# Altium PCB Remote_PCB_2.PcbDoc
Units mil, origin at the board's own origin, x right, y up, seen from the top; angles counter-clockwise.
Board outline 1210 x 1445 mil, 2 copper layers (Top Layer, Bottom Layer); 11 components, 10 nets, 40 pads, 0 vias.
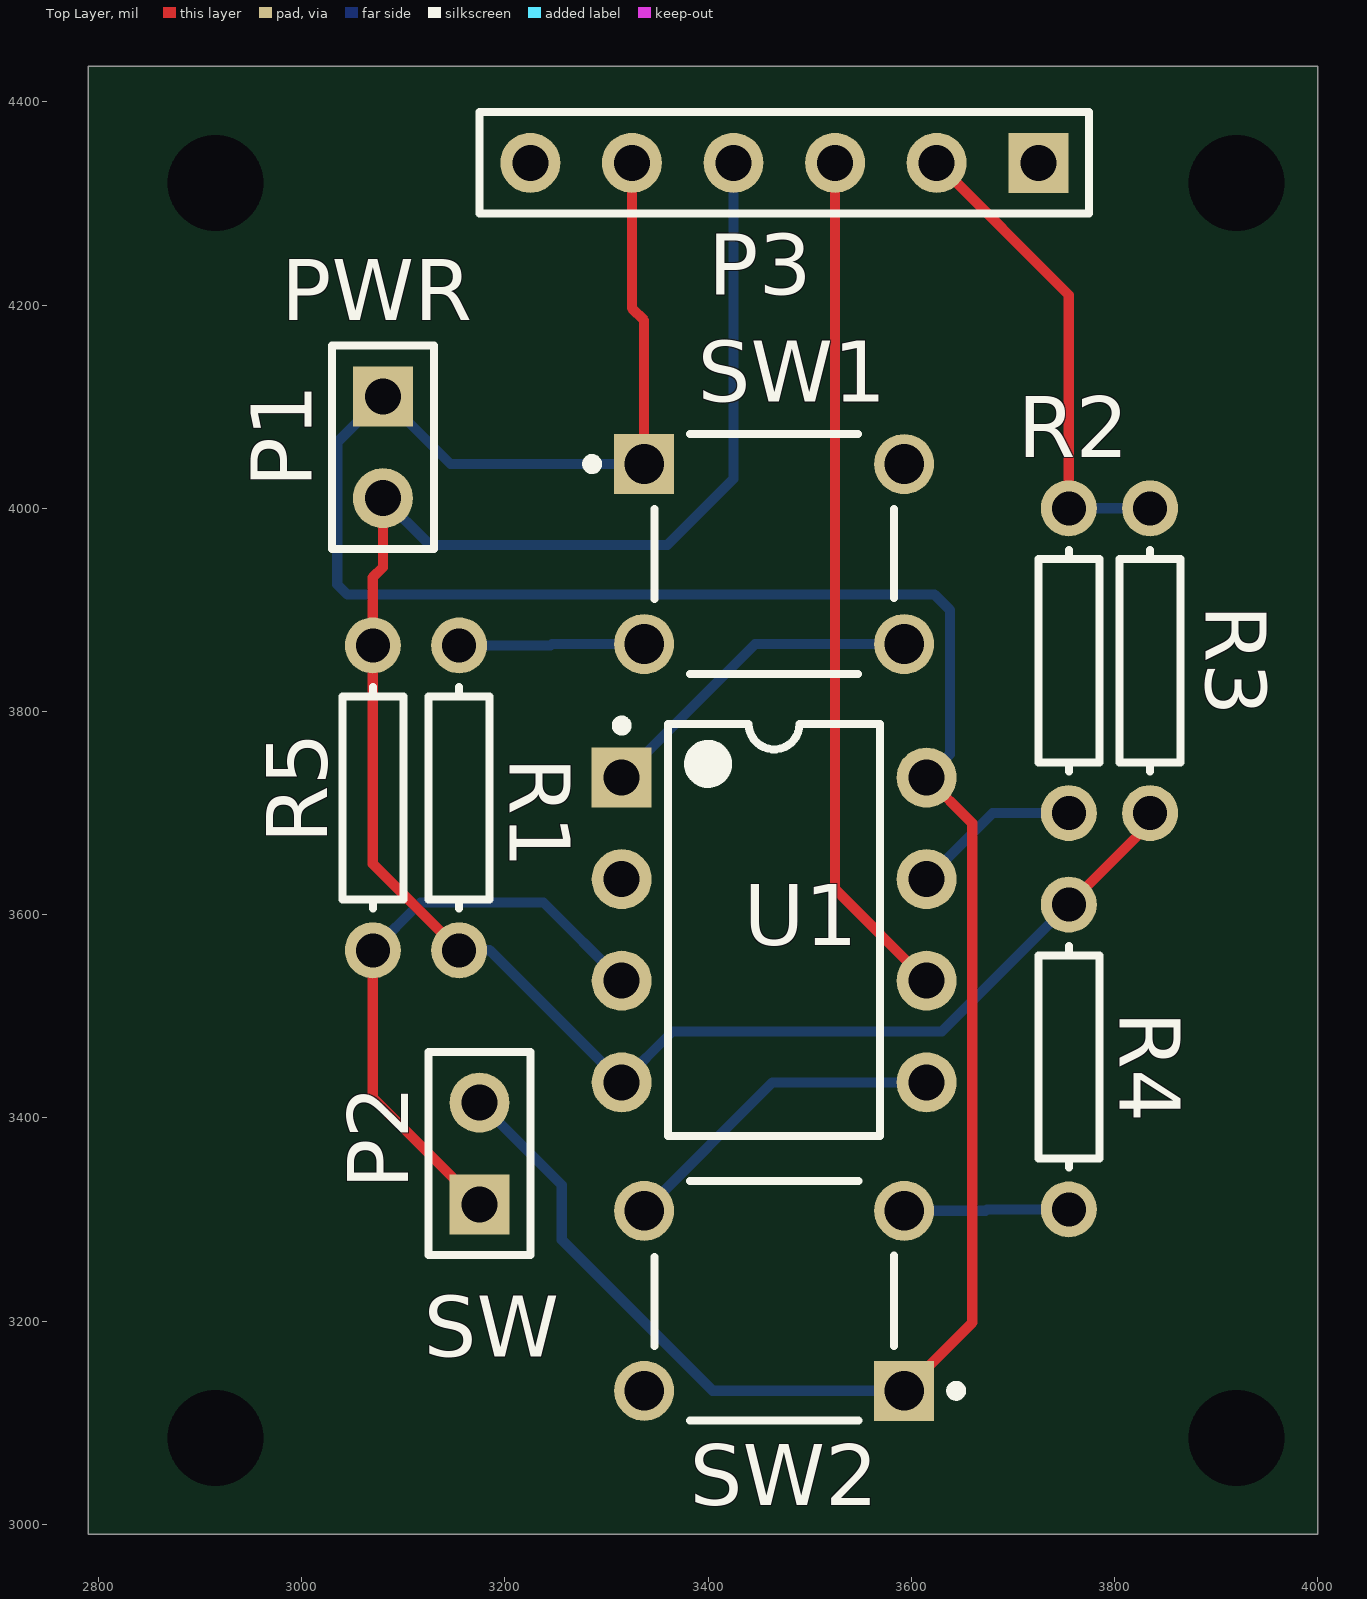
[diagram p0: Top Layer view]
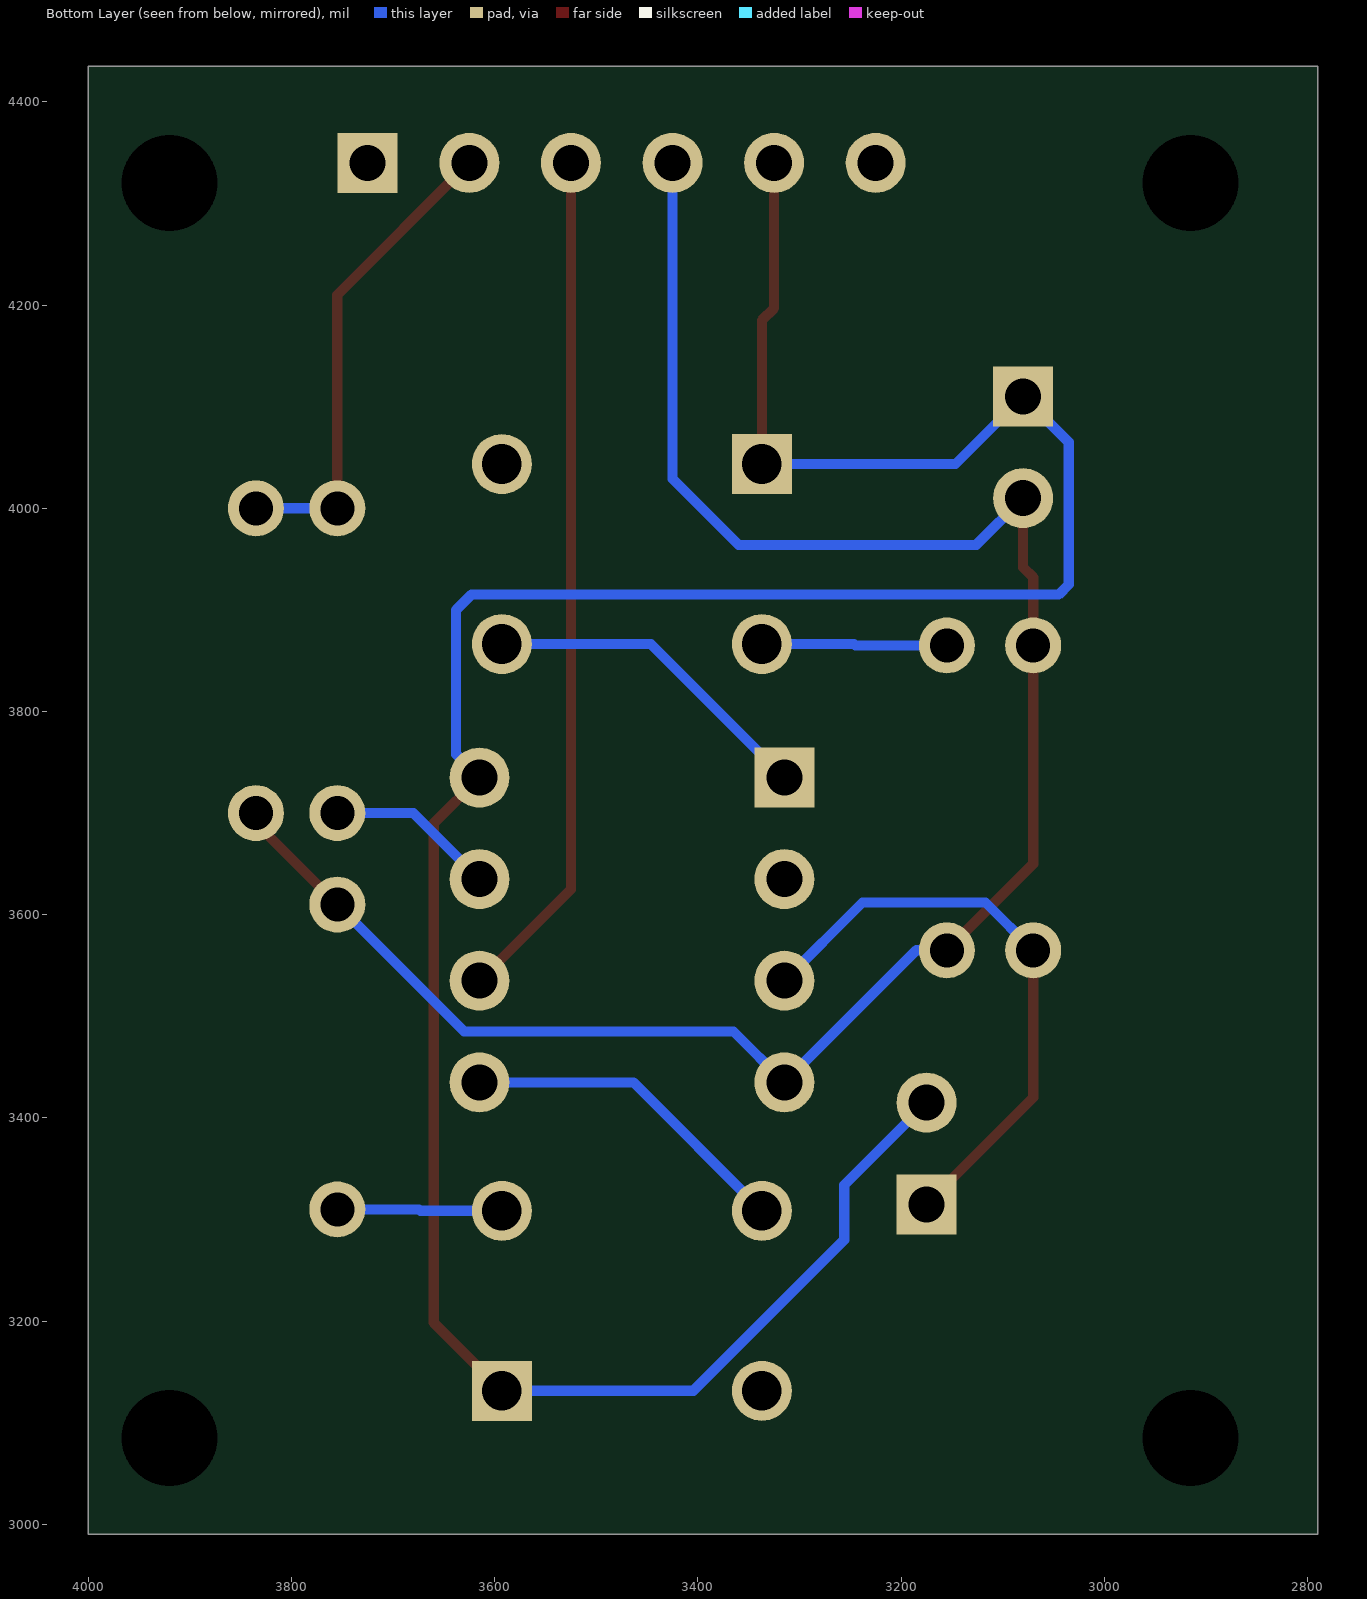
[diagram p1: Bottom Layer view, seen from below]

## Layer stack, top to bottom
Top Solder: solder mask 0.4, Solder Resist, Dk 3.5
Top Layer: signal copper 1.4
Dielectric 1: dielectric 12.6, FR-4, Dk 4.8
Bottom Layer: signal copper 1.4
Bottom Solder: solder mask 0.4, Solder Resist, Dk 3.5

## Board outline
2790,2990 4000,2990 4000,4435 2790,4435

## Design rules (kind name [scope] priority, off if disabled: settings)
Clearance [All] p1: gap=10 ignorepadtopadclearanceinfootprint=FALSE except(0: Arc-Hole Track-Hole SMDPad-Hole THPad-Hole Via-Hole Fill-Hole Poly-Hole Region-Hole Text-Hole)
PolygonConnect [All] p1: connectstyle=Relief reliefconductorwidth=10 reliefentries=4 polygonreliefangle="90 Angle" airgapwidth=10
RoutingVias [All] p1: holewidth=28 width=50 viastyle="Through Hole" minholewidth=28 minwidth=50 maxholewidth=28 maxwidth=50
SolderMaskExpansion [All] p1: expansion=4 istentingtop=FALSE
Width [All] p1: maxlimit=10 minlimit=10 preferedwidth=10
30 further rules are at their usual default settings.

## Components (designator, comment, footprint, x,y, rotation, side; value= is the part's Value field where it differs from the comment)
P1 "Header 2" HDR1X2 3080,4110 r270 top
P2 "Header 2" HDR1X2 3175,3315 r90 top
P3 "Header 6" HDR1X6 3725,4340 r180 top
R1 "Res1" AXIAL-0.3 3155,3715 r270 top value=1K
R2 "Res1" AXIAL-0.3 3755,3850 r90 top value=1K
R3 "Res1" AXIAL-0.3 3835,3850 r270 top value=2K
R4 "Res1" AXIAL-0.3 3755,3460 r90 top value=1K
R5 "Res1" AXIAL-0.3 3070,3715 r270 top value=1K
SW1 "1825910-6" TECO-1825910-6_V 3465,3955 r0 top
SW2 "1825910-6" TECO-1825910-6_V 3465,3220 r180 top
U1 "ATtiny85V-10PU" 8P3 3465,3585 r0 top

## Footprints (in the part's own frame and the unit in brackets; to place one, negate y for a bottom-side part, rotate by r counter-clockwise, add the part's x,y. Pads: shape width x height; smd on the part's side, far side on the other; paste and mask are expansions set on the pad)
8P3 [mm] "DIP, 8-Pin, Row Spacing 7.62 mm, Pitch 2.54 mm"
  rect 1.5x1.5 hole 0.9: 1(-3.81,3.81)
  round 1.5 hole 0.9: 2(-3.81,1.27) 3(-3.81,-1.27) 4(-3.81,-3.81) 5(3.81,-3.81) 6(3.81,-1.27) 7(3.81,1.27) 8(3.81,3.81)
  silkscreen extent -3.93,-5.15 2.65,5.23, body extent -3.6,-5.15 3.6,5.15, height 5.33
AXIAL-0.3 [mm] "Axial Device, Thru-Hole; 2 Leads; 0.3 in Pin Spacing"
  round 1.4 hole 0.85: 1(-3.81,0) 2(3.81,0)
  silkscreen extent -2.77,-0.76 2.77,0.76
HDR1X2 [mm] "Connector; Header; 2 Position"
  rect 1.5x1.5 hole 0.9: 1(0,0)
  round 1.5 hole 0.9: 2(2.54,0)
  silkscreen extent -1.27,-1.27 3.81,1.27
HDR1X6 [mm] "Connector; Header; 6 Position"
  rect 1.5x1.5 hole 0.9: 1(0,0)
  round 1.5 hole 0.9: 2(2.54,0) 3(5.08,0) 4(7.62,0) 5(10.16,0) 6(12.7,0)
  silkscreen extent -1.27,-1.27 13.97,1.27
TECO-1825910-6_V [mm] "Switch, 4-Leads, Body 5.99x5.99mm"
  rect 1.5x1.5 hole 0.99: 1(-3.25,2.25)
  round 1.5 hole 0.99: 2(3.25,2.25) 3(-3.25,-2.25) 4(3.25,-2.25)
  silkscreen extent -4.67,-3 3,3, body extent -3,-2.99 2.99,3, height 5

## Part data
P1 P2: "Header, 2-Pin", LatestRevisionDate=17-Jul-2002, LatestRevisionNote="Re-released for DXP Platform.", Publisher="Altium Limited"
P3: "Header, 6-Pin", LatestRevisionDate=17-Jul-2002, LatestRevisionNote="Re-released for DXP Platform.", Publisher="Altium Limited"
R1 R2 R3 R4 R5: "Resistor", LatestRevisionDate=17-Jul-2002, LatestRevisionNote="Re-released for DXP Platform.", PackageDescription="Axial Device, Thru-Hole; 2 Leads; 0.3 in Pin Spacing", PackageReference=AXIAL-0.3, Published=8-Jun-2000, Publisher="Altium Limited"
SW1 SW2: library part CMP-1684-00021-1, "Tact Switch, SPST-NO, 0.05 A, -35 to 85 degC, 4-Pin THD, RoHS, Bulk", Actuator Color=Black, Contact Rating @ Voltage=0.05A@24VDC, Dielectric Strength=500VAC, Manufacturer="TE Connectivity", Maximum AC Voltage Rating=N/A, Maximum Contact Resistance=100mOhm, Maximum DC Voltage Rating=24V, Minimum Insulation Resistance=100MOhm, Operating Temperature=-35to85C, Package Description="4-Pin Through Hole Device, Body 5.99 x 5.99 mm, Pitch 6.5 mm", Package Reference=THD, Actuator Length=1.4mm, Actuator Material=PolybutyleneTerephthalate, Actuator Style=RoundButton, Base Material=N/A, Body Orientation=Straight, Bushing Type=Unthreaded, Contact Material=CopperAlloy, Contact Plating=Silver, Datasheet URL=http://www.te.com/commerce/DocumentDelivery/DDEController?Action=showdoc&DocId=Customer+Drawing%7F1825910%7FC9%7Fpdf%7FEnglish%7FENG_CD_1825910_C9.pdf%7F1825910-6, Datasheet Version="Rev. C9", Dimension=5.99x5mm, Electrical Life=100000Cycles, Family=1825910, Function=MomentaryContact, Housing Material=N/A, Illumination=N/R, Manufacturer URL=http://www.te.com, Mechanical Life=100000Cycles, Mounting=ThroughHole, Packaging=N/A, Part No=1825910-6, Pole Throw Configuration=SPST, Product Weight=N/A, RoHS=Yes, Seal Description=N/A, Seal Location=N/A, Switch Configuration=OFF(ON), Terminal Type=PCPins, Thread Size=N/R
U1: library part CMP-0093-00033-2, "8-bit AVR Microcontroller, 10MHz, 1.8-5.5V, 8K Flash, 512 Bytes EEPROM, 512 Bytes SRAM, Industrial Grade (-40°C to 85°C), 8-Lead PDIP, Pb-Free", Code_JEDEC=MS-001-BA, ComponentLink1Description="Manufacturer URL", ComponentLink1URL=http://www.atmel.com/, ComponentLink2Description="ATtiny25/45/85 Datasheet", ComponentLink2URL=http://www.atmel.com/dyn/resources/prod_documents/doc2586.pdf, ComponentLink3Description="ATtiny25/45/85 Summary", ComponentLink3URL=http://www.atmel.com/dyn/resources/prod_documents/2586S.pdf, DatasheetVersion="revN, Apr-2011", PackageDescription="8-Lead, 0.300\" Wide Body, Plastic Dual In-Line Package (PDIP)", PackageReference=8P3, PackageVersion="revB, Jan-2002", RevisionNote="DatasheetVersion updated. URLs added."

## Free pads (board coordinates)
  round 60 hole 94.49: 33(2915,4320) 34(3920,4320) 35(3920,3085) 36(2915,3085)

## Nets (pads, with @x,y where several pads share a name; then routed paths per layer and width w, separated by ;. In a path a pad name is that pad's centre, name@x,y a point inside that pad or via, vN(x,y) a via of type N, cw(c..) or ccw(c..) an arc to the next point about the centre after c; other vN are vias at no path point)
+5: P1.1 P2.2 P3.5 SW1.1 SW2.1 U1.8 | length 2794.5
  Top Layer w10: P3.5 3325,4197.05 3337.05,4185 SW1.1 ; SW2.1 3660,3198.47 3660,3690 U1.8
  Bottom Layer w10: P2.2 3256,3334 3256,3280 3404.58,3131.42 SW2.1 ; SW1.1 3146.42,4043.58 P1.1 3035,4065 3035,3925 3045,3915 3623,3915 3638,3900 3638,3758 U1.8
GND: P1.2 P3.4 R1.2 R3.2 R4.2 R5.1 U1.4 | length 2035.8
  Top Layer w10: P1.2 3080,3942 3070,3932 R5.1 3070,3650 R1.2 ; R4.2 3835,3690 R3.2
  Bottom Layer w10: P1.2 3126,3964 3360,3964 3425,4029 P3.4 ; R1.2 3185,3565 U1.4 3365,3485 3630,3485 R4.2
NetP2_1: P2.1 R5.2 U1.3 | length 589.9
  Top Layer w10: R5.2 3070,3420 P2.1
  Bottom Layer w10: R5.2 3117,3612 3238,3612 U1.3
NetP3_2: P3.2 R2.2 R3.1 | length 473.8
  Top Layer w10: P3.2 3755,4210 R2.2
  Bottom Layer w10: R2.2 R3.1
NetP3_3: P3.3 U1.6 | length 842.3
  Top Layer w10: P3.3 3525,3625 U1.6
NetR1_1: R1.1 SW1.3 | length 182.6
  Bottom Layer w10: R1.1 3245,3865 3246.42,3866.42 SW1.3
NetR2_1: R2.1 U1.7 | length 166.9
  Bottom Layer w10: U1.7 3680,3700 R2.1
NetR4_1: R4.1 SW2.3 | length 162.6
  Bottom Layer w10: SW2.3 3673,3308.58 3674.42,3310 R4.1
NetSW1_4: SW1.4 U1.1 | length 332.4
  Bottom Layer w10: U1.1 3446.42,3866.42 SW1.4
NetSW2_4: SW2.4 U1.5 | length 330.3
  Bottom Layer w10: SW2.4 3463.47,3435 U1.5
pads on no net: P3.1 P3.6 SW1.2 SW2.2 U1.2

## Silkscreen, mask and mechanical layers (free items; w line width, h text height)
Top Overlay:
  text "PWR" at 2980,4185 h60
  text "SW" at 3120,3165 h60
Mechanical 1:
  lines w10: 2850,3000 3985,3000 3985,4425 2850,4425 2850,3000